# EAGLE board SharkBait (EAGLE 7.1.0)
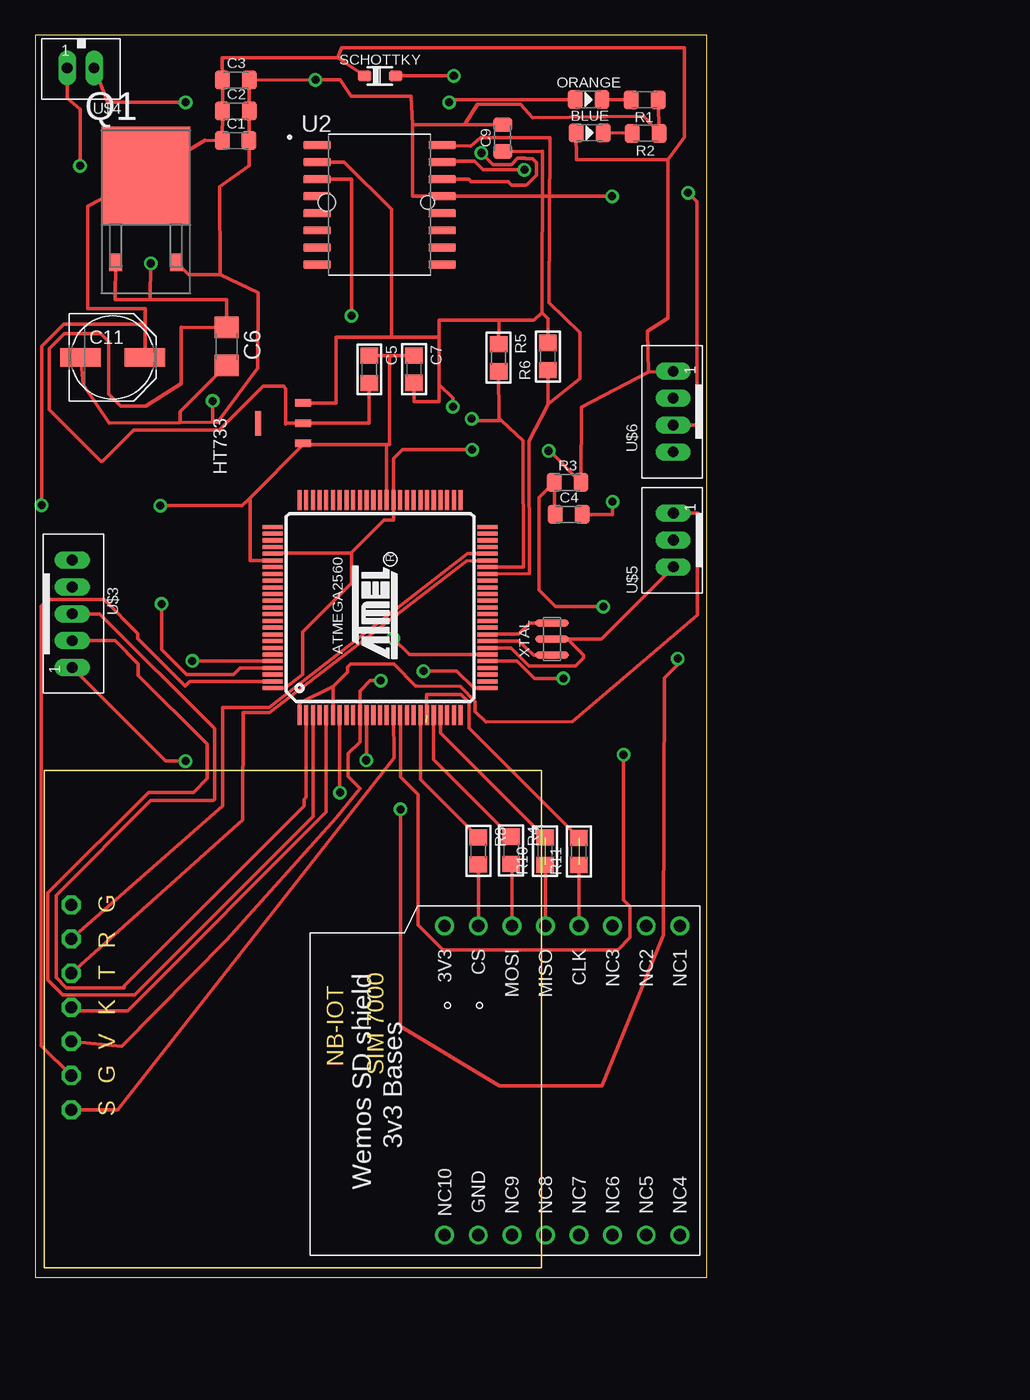
[diagram p0: board, top side]
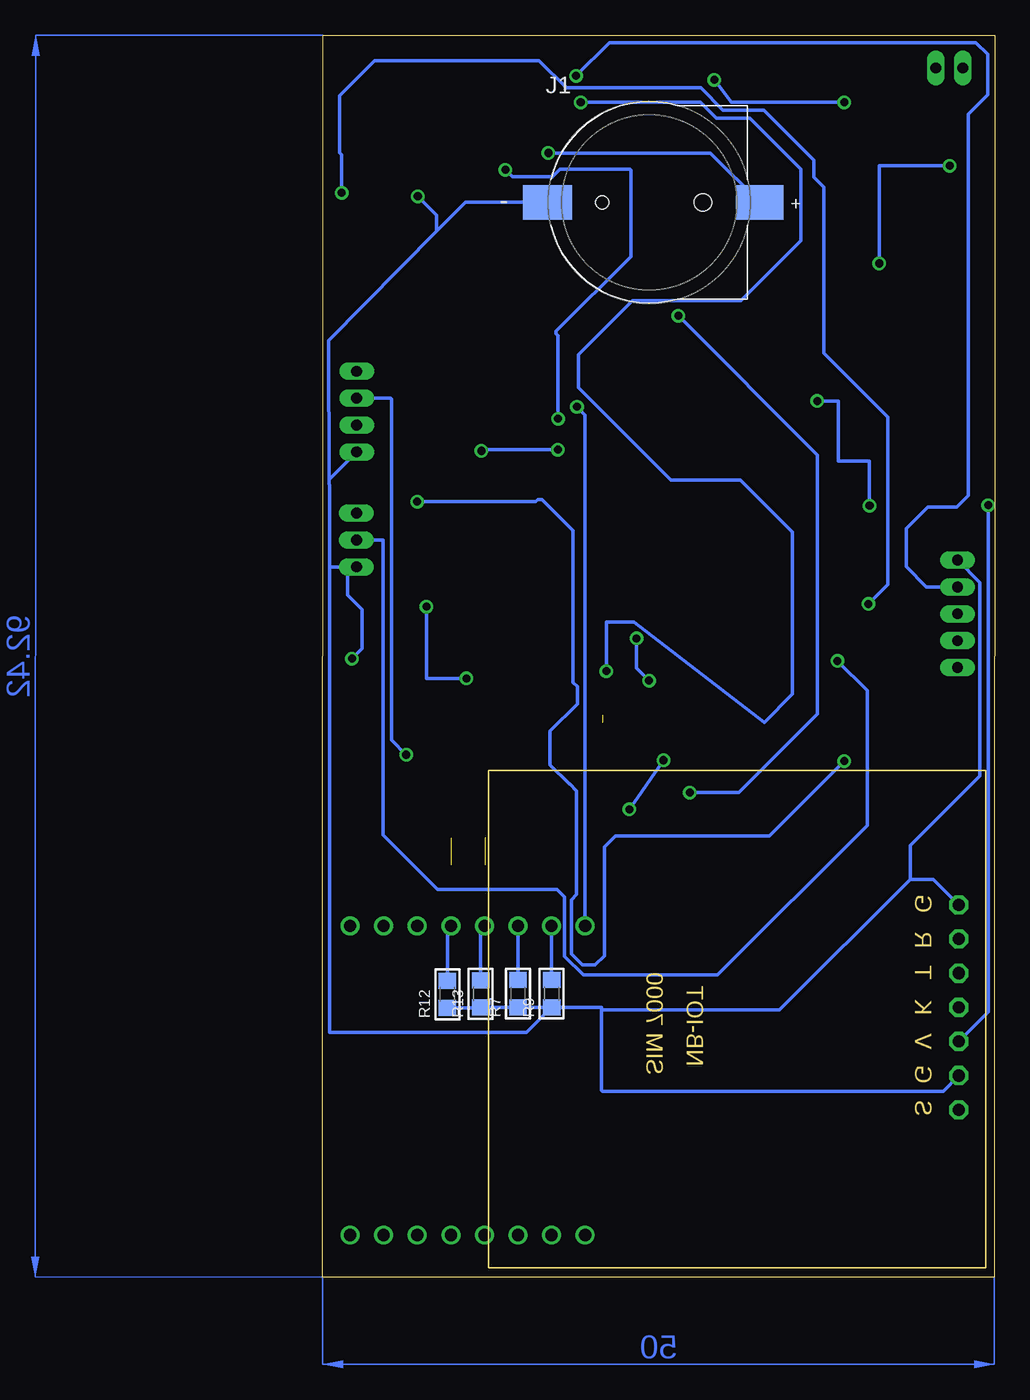
[diagram p1: board, bottom side, seen from below]

Size 50.02 x 92.42 mm. Coordinates in mm from the lower left corner, seen from the top.
Outline: 0.02,0 50.02,0 50,92.42 0,92.42 0.02,0
Copper layers (1*16): Top 0.035mm / dielectric 1.5mm / Bottom 0.035mm
Design rules "default": minimum track width 10mil, minimum drill 24mil, track to track 8mil, track to pad 8mil, pad to pad 8mil, via to via 8mil, smd to smd 8mil, copper to edge 40mil, drill to drill 8mil, minimum pad ring 10mil, minimum via ring 8mil, stop-mask expansion 4mil, vias tented up to drill 0mil, thermal gap 10mil

## Footprints (pad centres in the part's own frame; a part is rotated, then mirrored left to right if it is on the bottom)
TQFP100 = smd 1.5 x 0.3: 1 -8,6; 2 -8,5.5; 3 -8,5; 4 -8,4.5; 5 -8,4; 6 -8,3.5; 7 -8,3; 8 -8,2.5; 9 -8,2; 10 -8,1.5; 11 -8,1; 12 -8,0.5; 13 -8,0; 14 -8,-0.5; 15 -8,-1; 16 -8,-1.5; 17 -8,-2; 18 -8,-2.5; 19 -8,-3; 20 -8,-3.5; 21 -8,-4; 22 -8,-4.5; 23 -8,-5; 24 -8,-5.5; 25 -8,-6; 51 8,-6; 52 8,-5.5; 53 8,-5; 54 8,-4.5; 55 8,-4; 56 8,-3.5; 57 8,-3; 58 8,-2.5; 59 8,-2; 60 8,-1.5; 61 8,-1; 62 8,-0.5; 63 8,0; 64 8,0.5; 65 8,1; 66 8,1.5; 67 8,2; 68 8,2.5; 69 8,3; 70 8,3.5; 71 8,4; 72 8,4.5; 73 8,5; 74 8,5.5; 75 8,6 | smd 0.3 x 1.5: 26 -6,-8; 27 -5.5,-8; 28 -5,-8; 29 -4.5,-8; 30 -4,-8; 31 -3.5,-8; 32 -3,-8; 33 -2.5,-8; 34 -2,-8; 35 -1.5,-8; 36 -1,-8; 37 -0.5,-8; 38 0,-8; 39 0.5,-8; 40 1,-8; 41 1.5,-8; 42 2,-8; 43 2.5,-8; 44 3,-8; 45 3.5,-8; 46 4,-8; 47 4.5,-8; 48 5,-8; 49 5.5,-8; 50 6,-8; 76 6,8; 77 5.5,8; 78 5,8; 79 4.5,8; 80 4,8; 81 3.5,8; 82 3,8; 83 2.5,8; 84 2,8; 85 1.5,8; 86 1,8; 87 0.5,8; 88 0,8; 89 -0.5,8; 90 -1,8; 91 -1.5,8; 92 -2,8; 93 -2.5,8; 94 -3,8; 95 -3.5,8; 96 -4,8; 97 -4.5,8; 98 -5,8; 99 -5.5,8; 100 -6,8
SMD-0805-LED = smd 1.1 x 1.4: 1 -1,0; 2 1,0
SMD-0805 = smd 1.1 x 1.4: 1 -1,0; 2 1,0
C0805 = smd 1.2 x 1.3: 1 -1.016,0; 2 1.016,0
C1206 = smd 1.6 x 1.8: 1 -1.4,0; 2 1.4,0
PANASONIC_D = smd 3 x 1.4: + 2.4,0; - -2.4,0
SOT89 = smd 0.559 x 1.194: GND -1.499,-0.597; VIN 0,-0.597; VOUT 1.499,-0.597 | smd 1.829 x 0.457: P$4 0,2.743
MPD_BC501SM-TR = smd 3.54 x 2.6: + 8.23,0 | smd 3.66 x 2.6: - -7.57,0 | hole 1: -3.5,0 | hole 1.3: 4,0
TO225P972X240-3N = smd 0.94 x 1.321: 1 -2.261,-6.299; 3 2.261,-6.299 | smd 6.604 x 7.315: 2 0,0.152
R0805 = smd 1.2 x 1.3: 1 -1.016,0; 2 1.016,0
SOD-323 = smd 1 x 0.8: A 1.15,0; C -1.15,0
SOIC127P1032X265-16N = smd 2.05 x 0.59: 1 -4.655,4.445; 2 -4.655,3.175; 3 -4.655,1.905; 4 -4.655,0.635; 5 -4.655,-0.635; 6 -4.655,-1.905; 7 -4.655,-3.175; 8 -4.655,-4.445; 9 4.655,-4.445; 10 4.655,-3.175; 11 4.655,-1.905; 12 4.655,-0.635; 13 4.655,0.635; 14 4.655,1.905; 15 4.655,3.175; 16 4.655,4.445
WEMOS_SD_D1_MINI = drill 0.9: 3V3 1.5,10; CLK 1.5,20; CS 1.5,12.5; GND 24.5,12.5; MISO 1.5,15; MOSI 1.5,17.5; NC1 1.5,27.5; NC2 1.5,25; NC3 1.5,22.5; NC4 24.5,27.5; NC5 24.5,25; NC6 24.5,22.5; NC7 24.5,20; NC8 24.5,17.5; NC9 24.5,15; NC10 24.5,10
SIM_7000 = drill 0.9 octagon: 5V 20.16,2; GND 10,2; GND1 22.7,2; KEY 17.62,2; RX 12.54,2; SLEEP 25.24,2; TX 15.08,2
JST_B5B-PH_HEADER = drill 0.8 long: P1 4,0.048; P2 2,0.048; P3 0,0.048; P4 -2,0.048; P5 -4,0.048
JST_B2B-PH_HEADER = drill 0.8 long: P1 1.075,0.048; P2 -0.925,0.048
JST_B3B-PH_HEADER = drill 0.8 long: P1 2.027,0.048; P2 0.028,0.048; P3 -1.972,0.048
JST_B4B-PH_HEADER = drill 0.8 long: P1 2.98,0.048; P2 0.98,0.048; P3 -1.02,0.048; P4 -3.02,0.048
RESONATOR = smd 0.55 x 2.5: 1 -1.2,0; 2 0,0; 3 1.2,0

## Placement (x,y rotation side)
ATMEGA2560  ATMEGA2560  [TQFP100]  25.68,49.84 90 top
BLUE  L  [SMD-0805-LED]  41.28,85.17 0 top
C1  [SMD-0805]  14.93,84.59 0 top
C2  .1uF  [SMD-0805]  14.95,86.78 0 top
C3  .1uF  [SMD-0805]  14.95,89.09 0 top
C4  .1uF  [SMD-0805]  39.72,56.76 0 top
C5  100 uF  [C0805]  24.88,67.56 270 top
C6  100nF  [C1206]  14.25,69.27 270 top
C7  100 uF  [C0805]  28.21,67.57 270 top
C9  10uF  [SMD-0805]  34.81,84.77 90 top
C11  100uF  [PANASONIC_D]  5.78,68.45 0 top
HT733  HT7333  [SOT89]  19.36,63.56 90 top
J1  BC501SM-TR  [MPD_BC501SM-TR]  25.72,79.99 0 bottom
ORANGE  L  [SMD-0805-LED]  41.2,87.65 0 top
Q1  L78M05CDT  [TO225P972X240-3N]  8.26,81.83 0 top
R1  10k  [SMD-0805]  45.38,87.62 180 top
R2  10k  [SMD-0805]  45.46,85.13 180 top
R3  10k  [SMD-0805]  39.64,59.14 0 top
R4  1K8  [R0805]  35.44,31.76 270 top
R5  [R0805]  34.5,68.43 270 top
R6  [R0805]  38.17,68.52 90 top
R7  3K3  [R0805]  35.49,21.1 90 bottom
R8  1K8  [R0805]  33,31.72 270 top
R9  3K3  [R0805]  32.99,21.1 90 bottom
R10  1K8  [R0805]  37.96,31.7 90 top
R11  1K8  [R0805]  40.48,31.68 90 top
R12  3K3  [R0805]  40.75,21.04 90 bottom
R13  3K3  [R0805]  38.27,21.08 90 bottom
SCHOTTKY  DIODE  [SOD-323]  25.67,89.41 0 top
U2  DS3231M+  [SOIC127P1032X265-16N]  25.65,79.81 0 top
U$1  WEMOS_SD_D1_MINI  [WEMOS_SD_D1_MINI]  20.49,27.63 270 top
U$2  SIM7000  [SIM_7000]  0.68,37.7 270 top
U$3  JST-PH_5-PIN_HEADER  [JST_B5B-PH_HEADER]  2.72,49.37 270 top
U$4  JST-PH_2-PIN_HEADER  [JST_B2B-PH_HEADER]  3.46,90.05 180 top
U$5  JST-PH_3-PIN_HEADER  [JST_B3B-PH_HEADER]  47.56,54.84 90 top
U$6  JST-PH_4-PIN_HEADER  [JST_B4B-PH_HEADER]  47.55,64.44 90 top
XTAL  16M  [RESONATOR]  38.48,47.5 90 top

## Library data of the parts
ATMEGA2560 BLUE C1-C4 C9 ORANGE R1-R3 SCHOTTKY XTAL = Fuzzy
C5 C7 R4-R13 = rc-master-smd
C6 C11 = rcl
HT733 = C_HT7333_SOT89
J1 = C_BC501SM-TR; AVAILABILITY: Unavailable; DESCRIPTION: Holder Coin Cell For Cr1220 Smd; MF: MPD _Memory; MP: BC501SM-TR; PACKAGE: DFN-8 MPD; PRICE: None
Q1 = C_L78M05CDT; AVAILABILITY: Unavailable; DESCRIPTION: L78M Series 500 mA 5 V Three Terminal Positive Voltage LDO Regulator - TO-252; MF: STMicroelectronics; MP: L78M05CDT-TR; PACKAGE: TO-252-3 STMicroelectronics; PRICE: None
U2 = C_DS3231M_; DESCRIPTION: Ic Real Time Clock I2c 16soic - Ds3231m+; DIGI-KEY_PART_NUMBER: DS3231M+-ND; DIGI-KEY_PURCHASE_URL: https://www.digikey.co.id/product-detail/en/maxim-integrated/DS3231M-/DS3231M--ND/2402420?utm_source=snapeda&utm_medium=aggregator&utm_campaign=symbol; MF: Maxim Integrated; MP: DS3231M+; PACKAGE: SOIC-16 Maxim
U$1 = C_WEMOS_SD_D1_MINI
U$2 = C_SIM7000
U$3-U$6 = srg

## Nets
3V3: C7.2 C9.1 HT733.VOUT R5.1 R6.2 U2.2 U$1.3V3
5V: ATMEGA2560.10 ATMEGA2560.31 ATMEGA2560.61 ATMEGA2560.80 ATMEGA2560.100 BLUE.1 C1.1 C2.1 C3.1 C11.+ Q1.2 R3.2 SCHOTTKY.C U$2.5V U$6.P1
A0: ATMEGA2560.97 U$6.P3
A1: ATMEGA2560.96 U$5.P2
AREF: ATMEGA2560.98
D3: ATMEGA2560.7 U2.3
D4: ATMEGA2560.1 ATMEGA2560.6 U$5.P1
D5: ATMEGA2560.5 U$2.KEY
D6: ATMEGA2560.15 U$2.SLEEP
D7: ATMEGA2560.16 U$6.P2
D13: ATMEGA2560.26 ORANGE.1
DTR: C4.2 U$3.P1
GND: ATMEGA2560.11 ATMEGA2560.32 ATMEGA2560.62 ATMEGA2560.81 ATMEGA2560.99 C1.2 C2.2 C3.2 C5.1 C6.2 C7.1 C9.2 C11.- HT733.GND J1.- Q1.3 R1.1 R2.1 R7.1 R9.1 R12.1 R13.1 U2.13 U$2.GND U$2.GND1 U$3.P5 U$4.P2 U$5.P3 U$6.P4 XTAL.2
MISO: ATMEGA2560.22 R10.1 R10.2 R13.2 U$1.MOSI
MOSI: ATMEGA2560.21 R4.1
N$1: J1.+ U2.14
N$2: R4.2 R7.2 U$1.MISO
N$13: ATMEGA2560.34 XTAL.3
N$81: ATMEGA2560.33 XTAL.1
N$82: ORANGE.2 R1.2
N$83: BLUE.2 R2.2
RST: ATMEGA2560.30 C4.1 R3.1
RX0: ATMEGA2560.2 U$3.P3
RX1: ATMEGA2560.45 U$2.TX
SCK: ATMEGA2560.20 R11.1 R11.2 R12.2 U$1.CLK
SCK1: R8.2 R9.2 U$1.CS
SCL: ATMEGA2560.43 R6.1 U2.16
SDA: ATMEGA2560.44 R5.2 U2.15
SS: ATMEGA2560.19 R8.1
TX0: ATMEGA2560.3 U$3.P2
TX1: ATMEGA2560.46 U$2.RX
VBAT: C5.2 C6.1 HT733.VIN Q1.1 U$4.P1
VCC: SCHOTTKY.A U$3.P4

## Tracks (layer width: path | path; a pad name or v marks a point on that pad's centre or on a via)
3V3  (via drill 0.6)
  Top 0.254: C7.2 28.21,65.18 30.09,65.18 30.09,66.44 | 30.09,66.44 30.09,69.96 | 30.09,69.96 26.52,69.96 | 26.52,69.96 22.4,69.96 22.4,65.06 HT733.VOUT | 34.54,71.21 37.13,71.21 37.74,71.77 | 34.54,71.21 30.08,71.21 30.09,69.96 | C9.1 37.79,83.8 37.74,71.77 | R6.2 38.19,71.33 37.74,71.77 | R5.1 34.54,71.21 | U2.2 23.01,82.98 26.52,79.47 26.52,69.96 | v31.1,64.78 31.1,65.43 30.09,66.44
  Bottom 0.254: U$1.3V3 30.49,64.17 v31.1,64.78
5V  (via drill 0.6)
  Top 0.254: C11.+ 8.19,70.71 | 8.19,70.71 8.19,72.07 3.91,72.07 3.91,79.71 Q1.2 12.66,84.63 C1.1 C2.1 C3.1 13.94,90.75 22.53,90.75 | 22.53,90.75 SCHOTTKY.C | BLUE.1 40.29,83.18 47.12,83.18 | 47.12,83.18 48.32,84.85 48.32,91.49 22.8,91.49 22.53,90.75 | 45.66,67.35 40.69,64.76 R3.2 38.28,61.5 v38.22,61.5 | 45.66,67.35 U$6.P1 | v0.49,57.46 0.49,69.3 2.13,70.94 7.96,70.94 8.19,70.71 | 47.12,83.18 47.12,71.37 45.58,70.41 45.66,67.35 | ATMEGA2560.80 17.72,53.88 23.53,53.88 | 23.53,53.88 25.99,56.34 26.68,56.34 ATMEGA2560.61 26.68,60.93 27.34,61.59 v32.53,61.59 | ATMEGA2560.31 27.86,46.34 v26.66,47.54 | v25.73,44.39 24.94,44.39 24.18,43.63 ATMEGA2560.10 24.18,39.83 23.31,38.96 23.31,37.25 24.19,36.37 22.4,34.16 14.25,25.11 6.46,17.16 U$2.5V | ATMEGA2560.100 18.62,43.85 19.92,44.86 19.92,48.01 23.56,51.65 23.56,53.85 23.53,53.88
  Bottom 0.254: U$2.5V 0.49,19.73 v0.49,57.46 | v38.22,61.5 38.13,61.59 v32.53,61.59 | v26.66,47.54 26.66,45.32 v25.73,44.39
A0  (via drill 0.6)
  Top 0.254: U$6.P3 49.28,63.42 49.28,80.03 v48.61,80.7 | v9.41,50.1 9.41,46.7 11.27,44.84 14.77,44.84 15.27,45.34 ATMEGA2560.97
  Bottom 0.254: v48.61,80.7 48.61,83.55 48.76,83.7 48.76,87.93 46.15,90.54 33.92,90.54 31.9,88.52 21.89,88.52 20.23,86.86 17.18,86.86 13.47,83.15 13.47,81.87 12.72,81.12 12.72,68.79 7.95,64.02 7.95,51.56 v9.41,50.1
A1  (via drill 0.6)
  Top 0.254: ATMEGA2560.96 11.74,45.84 arc-90 v11.71,45.87
  Bottom 0.254: v11.71,45.87 9.5,43.66 9.5,33.62 20.64,22.48 30.63,22.48 32.02,23.87 32.02,28.29 32.58,28.85 41.49,28.85 45.54,32.9 45.54,54.85 45.56,54.87 U$5.P2
D3  (via drill 0.6)
  Top 0.254: U2.3 23.55,81.72 v23.55,71.55 | v22.7,36.06 22.68,36.08 ATMEGA2560.7
  Bottom 0.254: v23.55,71.55 13.19,61.19 13.19,41.92 19.05,36.06 v22.7,36.06
D4
  Top 0.254: U$5.P1 49.34,56.86 49.31,49.27 40,41.34 33.56,41.32 32.76,42.1 32.76,42.84 31.66,43.96 28.45,44 28.34,44 26.72,45.62 23.47,45.62 23.26,45.41 23.26,45.04 22.17,43.95 | 22.17,43.95 ATMEGA2560.6 | ATMEGA2560.1 19.69,42.74 22.17,43.95
D5
  Top 0.254: ATMEGA2560.5 21.68,34.63 6.88,19.83 2.93,19.83 U$2.KEY
D6
  Top 0.254: U$2.SLEEP 6.14,12.44 26.72,38.64 ATMEGA2560.15
D7  (via drill 0.6)
  Top 0.254: ATMEGA2560.16 27.19,37.23 28.5,35.92 28.5,26.23 30.37,24.36 43.39,24.36 44.3,25.27 44.3,27.6 43.81,28.09 v43.81,38.88
  Bottom 0.254: v43.81,38.88 44.9,39.97 44.9,65.35 44.97,65.42 U$6.P2
D13  (via drill 0.6)
  Top 0.254: ORANGE.1 30.82,87.65 v30.82,87.44 | v28.91,45.11 31.36,45.11 32.66,43.85 ATMEGA2560.26
  Bottom 0.254: v30.82,87.44 21.9,87.44 20.73,86.27 18.22,86.27 14.43,82.48 14.43,77.14 18.91,72.66 26.99,72.66 30.99,68.66 30.99,66.21 24.1,59.32 18.93,59.32 15.05,55.44 15.05,43.39 17.16,41.28 26.87,48.75 28.9,48.75 v28.91,45.11
DTR  (via drill 0.6)
  Top 0.254: U$3.P1 9.74,38.4 v11.2,38.4 | v42.99,57.72 42.99,56.76 C4.2
  Bottom 0.254: v11.2,38.4 16.76,32.84 28.23,32.84 29.06,32.01 29.06,23.92 29.76,23.22 30.69,23.22 31.52,24.05 31.52,28.08 31.12,28.48 31.12,36.2 31.61,36.69 31.67,36.69 33.11,38.13 33.11,40.64 31.08,42.67 31.08,43.95 31.4,44.27 31.4,55.58 33.7,57.88 34.02,57.88 34.18,57.72 v42.99,57.72
GND  (via drill 0.6)
  Top 0.254: U$5.P3 42.14,47.5 XTAL.2 39.62,47.5 40.81,46.31 40.81,46.09 40.22,45.5 36.76,45.5 35.42,46.84 ATMEGA2560.32 | C5.1 C7.1 26.4,68.59 26.4,61.95 26.17,61.95 | 26.17,61.95 19.96,61.95 | 19.96,61.95 HT733.GND | C9.2 31.97,85.77 | 31.97,85.77 28.1,85.78 | 28.1,85.78 28.1,80.47 U2.13 v42.95,80.44 | 13.77,74.62 13.73,81.16 15.95,82.71 C1.2 C2.2 C3.2 v20.88,89.11 22.71,89.12 23.53,87.89 27.98,87.88 28.1,85.78 | 13.77,74.62 16.62,73.29 16.57,67.64 13.6,63.64 | 13.6,63.64 10.79,63.61 | 10.79,63.61 5.5,63.55 3.59,66.44 C11.- | U$4.P2 5.39,87.44 v11.21,87.44 | R1.1 R2.1 45.27,86.39 37.03,86.3 36.13,87.28 32.94,87.28 31.97,85.77 | C6.2 10.79,64.41 10.79,63.61 | Q1.3 11.43,74.62 13.77,74.62 | 19.96,61.95 16,57.99 | 16,57.99 16,53.33 16.01,53.34 ATMEGA2560.81 | ATMEGA2560.62 26.17,61.95 | 16,57.99 15.42,57.41 v9.32,57.41 | v13.22,65.21 13.22,63.64 13.6,63.64 | ATMEGA2560.99 11.51,44.34 11.17,44 7.64,47.53 7.64,47.92 5.14,50.42 0.92,50.42 0.46,49.96 0.46,17.22 U$2.GND1 | ATMEGA2560.11 24.68,38.5 v24.65,38.47 | v27.2,34.81 27.2,18.66 34.56,14.25 42.21,14.25 46.78,25.48 46.85,44.6 47.85,45.6 v47.85,46.03
  Bottom 0.254: R9.1 R7.1 35.51,20.06 R13.1 38.31,20.02 R12.1 | R9.1 34.86,18.21 49.52,18.21 49.53,18.22 49.53,52.87 | 49.53,52.87 48.18,52.87 | 48.18,52.87 U$5.P3 | U$2.GND 4.58,29.6 6.3,29.6 | 29.26,20.07 29.27,20.08 | 29.27,20.08 R9.1 | U$2.GND1 3.85,13.83 29.2,13.83 29.27,13.9 29.27,19.88 | 29.27,19.88 29.27,20.08 | U$6.P4 49.57,59.35 49.57,59.09 | 49.57,59.09 49.57,59.01 49.53,58.97 49.53,52.87 | U$3.P5 1.11,51.71 1.11,37.3 6.3,32.11 6.3,29.6 | J1.- 39.39,80.02 41.55,77.84 | 41.55,77.84 49.6,69.71 49.57,59.09 | v11.21,87.44 19.6,87.44 v20.88,89.11 | v42.95,80.44 41.55,79.04 41.55,77.84 | 6.3,29.6 16.02,19.88 29.27,19.88 | v9.32,57.41 9.32,60.74 11.63,60.74 11.63,65.21 v13.22,65.21 | v24.65,38.47 v27.2,34.81 | v47.85,46.03 47.1,46.78 47.1,49.68 48.18,50.76 48.18,52.87
MISO  (1 unrouted)
  Top 0.254: R10.1 37.99,30.65 U$1.MOSI | R10.2 30.18,40.5 ATMEGA2560.22
  Bottom 0.254: U$1.MOSI 38.27,25.85 R13.2
MOSI
  Top 0.254: R4.1 29.68,38.54 ATMEGA2560.21
N$1  (via drill 0.6)
  Top 0.254: v33.23,83.67 34.1,82.8 35.46,82.8 35.93,83.27 36.5,83.27 36.51,83.26 37.01,83.26 37.31,82.96 37.31,82.01 36.66,81.36 36.65,81.36 36.56,81.27 35.48,81.27 35.25,81.5 35.25,81.55 35.22,81.52 32.47,81.52 32.29,81.7 32.29,81.72 32.28,81.72 U2.14
  Bottom 0.254: J1.+ 21.17,83.67 v33.23,83.67
N$2
  Top 0.254: R4.2 35.49,30.38 U$1.MISO
  Bottom 0.254: U$1.MISO R7.2
N$13
  Top 0.254: ATMEGA2560.34 35.99,47.85 36.84,48.7 XTAL.3
N$81
  Top 0.254: ATMEGA2560.33 36,47.34 37.11,46.3 XTAL.1
N$82
  Top 0.254: ORANGE.2 R1.2
N$83
  Top 0.254: BLUE.2 R2.2
RST  (via drill 0.6)
  Top 0.254: C4.1 R3.1 37.51,58.01 37.51,51.14 38.75,49.9 v42.31,49.9 | v39.33,44.56 37.16,44.56 35.88,45.84 ATMEGA2560.30
  Bottom 0.254: v42.31,49.9 42.31,44.56 v39.33,44.56
RX0
  Top 0.254: U$3.P3 4.83,49.37 13.35,40.85 13.35,35.56 13.25,35.46 8.6,35.46 1.56,28.42 1.56,22.29 2.31,21.54 6.64,21.54 6.64,21.69 20.02,35.07 20.02,35.55 20.19,35.72 ATMEGA2560.2 20.2,41.82
RX1
  Top 0.254: U$2.TX 15.47,34.04 15.49,42.03 17.46,42.03 32.11,53.29 ATMEGA2560.45
SCK  (2 unrouted)
  Top 0.254: R11.1 U$1.CLK | R11.2 32.29,40.89 32.29,42.78 31.7,43.37 29.13,43.37 29.16,43.34 29.16,41.29
  Bottom 0.254: U$1.CLK 40.75,25.87 R12.2
SCK1
  Top 0.254: R8.2 U$1.CS
  Bottom 0.254: U$1.CS R9.2
SCL
  Top 0.254: R6.1 38.19,64.98 | 38.19,64.98 38.19,64.93 36.77,62.24 36.8,52.36 ATMEGA2560.43 | U2.16 32.43,84.18 33.16,84.8 38.32,84.82 38.26,72.52 40.56,70.28 40.58,66.86 38.19,64.98
SDA  (via drill 0.6)
  Top 0.254: R5.2 34.54,63.93 34.72,63.76 | 34.72,63.76 36.34,62.26 36.35,52.84 ATMEGA2560.44 | U2.15 30.36,83.04 32.72,83.04 33.35,82.41 v36.43,82.41 | v32.5,63.89 32.63,63.76 34.72,63.76
  Bottom 0.254: v36.43,82.41 35.91,81.89 32.94,81.89 32.38,82.45 27.16,82.45 27.09,82.38 27.09,75.96 32.65,70.4 32.65,70.22 32.5,70.07 v32.5,63.89
SS
  Top 0.254: R8.1 28.68,37.06 ATMEGA2560.19
TX0
  Top 0.254: U$3.P2 5.95,47.37 7.69,45.63 7.69,44.79 12.81,39.67 12.81,37.1 11.79,36.08 8.45,36.08 0.96,28.59 0.96,22.12 2.06,21.02 7.41,21.02 20.68,34.29 ATMEGA2560.3
TX1
  Top 0.254: U$2.RX 13.95,35.08 13.96,42.38 17.41,42.38 32.2,53.85 ATMEGA2560.46
VBAT  (via drill 0.6)
  Top 0.254: C5.2 24.88,63.56 HT733.VIN 18.73,63.56 18.66,63.49 18.66,66.14 18.5,66.3 16.96,66.3 13.69,63.03 7.33,63.03 5.05,60.75 4.89,60.75 1.07,64.57 1.07,69.11 2.18,70.22 4.9,70.22 5.48,69.64 5.48,65.71 6.37,64.82 8.24,64.82 10.86,66.52 10.86,70.69 C6.1 14.25,72.74 8.58,72.74 | 8.58,72.74 5.98,72.74 Q1.1 | U$4.P1 2.39,87.74 3.35,86.93 v3.35,82.71 | v8.61,75.45 8.58,72.74
  Bottom 0.254: v3.35,82.71 8.61,82.74 v8.61,75.45
VCC  (via drill 0.6)
  Top 0.254: v31.17,89.41 SCHOTTKY.A
  Bottom 0.254: U$3.P4 5.09,51.37 6.59,52.87 6.59,55.72 4.98,57.33 2.82,57.33 1.98,58.17 1.98,86.55 0.52,88.01 0.52,91.01 1.4,91.89 28.69,91.89 v31.17,89.41
(copper drawn outside any net)
  shapes: Bottom area x2